# Altium PCB Carte_GR_2017.PcbDoc (part 1 of 2)
Units mil, origin at the board's own origin, x right, y up, seen from the top; angles counter-clockwise.
Board outline 6500 x 3500 mil, 2 copper layers (Top Layer, Bottom Layer); 159 components, 151 nets, 592 pads, 138 vias.
Unrouted connection lines stored in the file: 4.
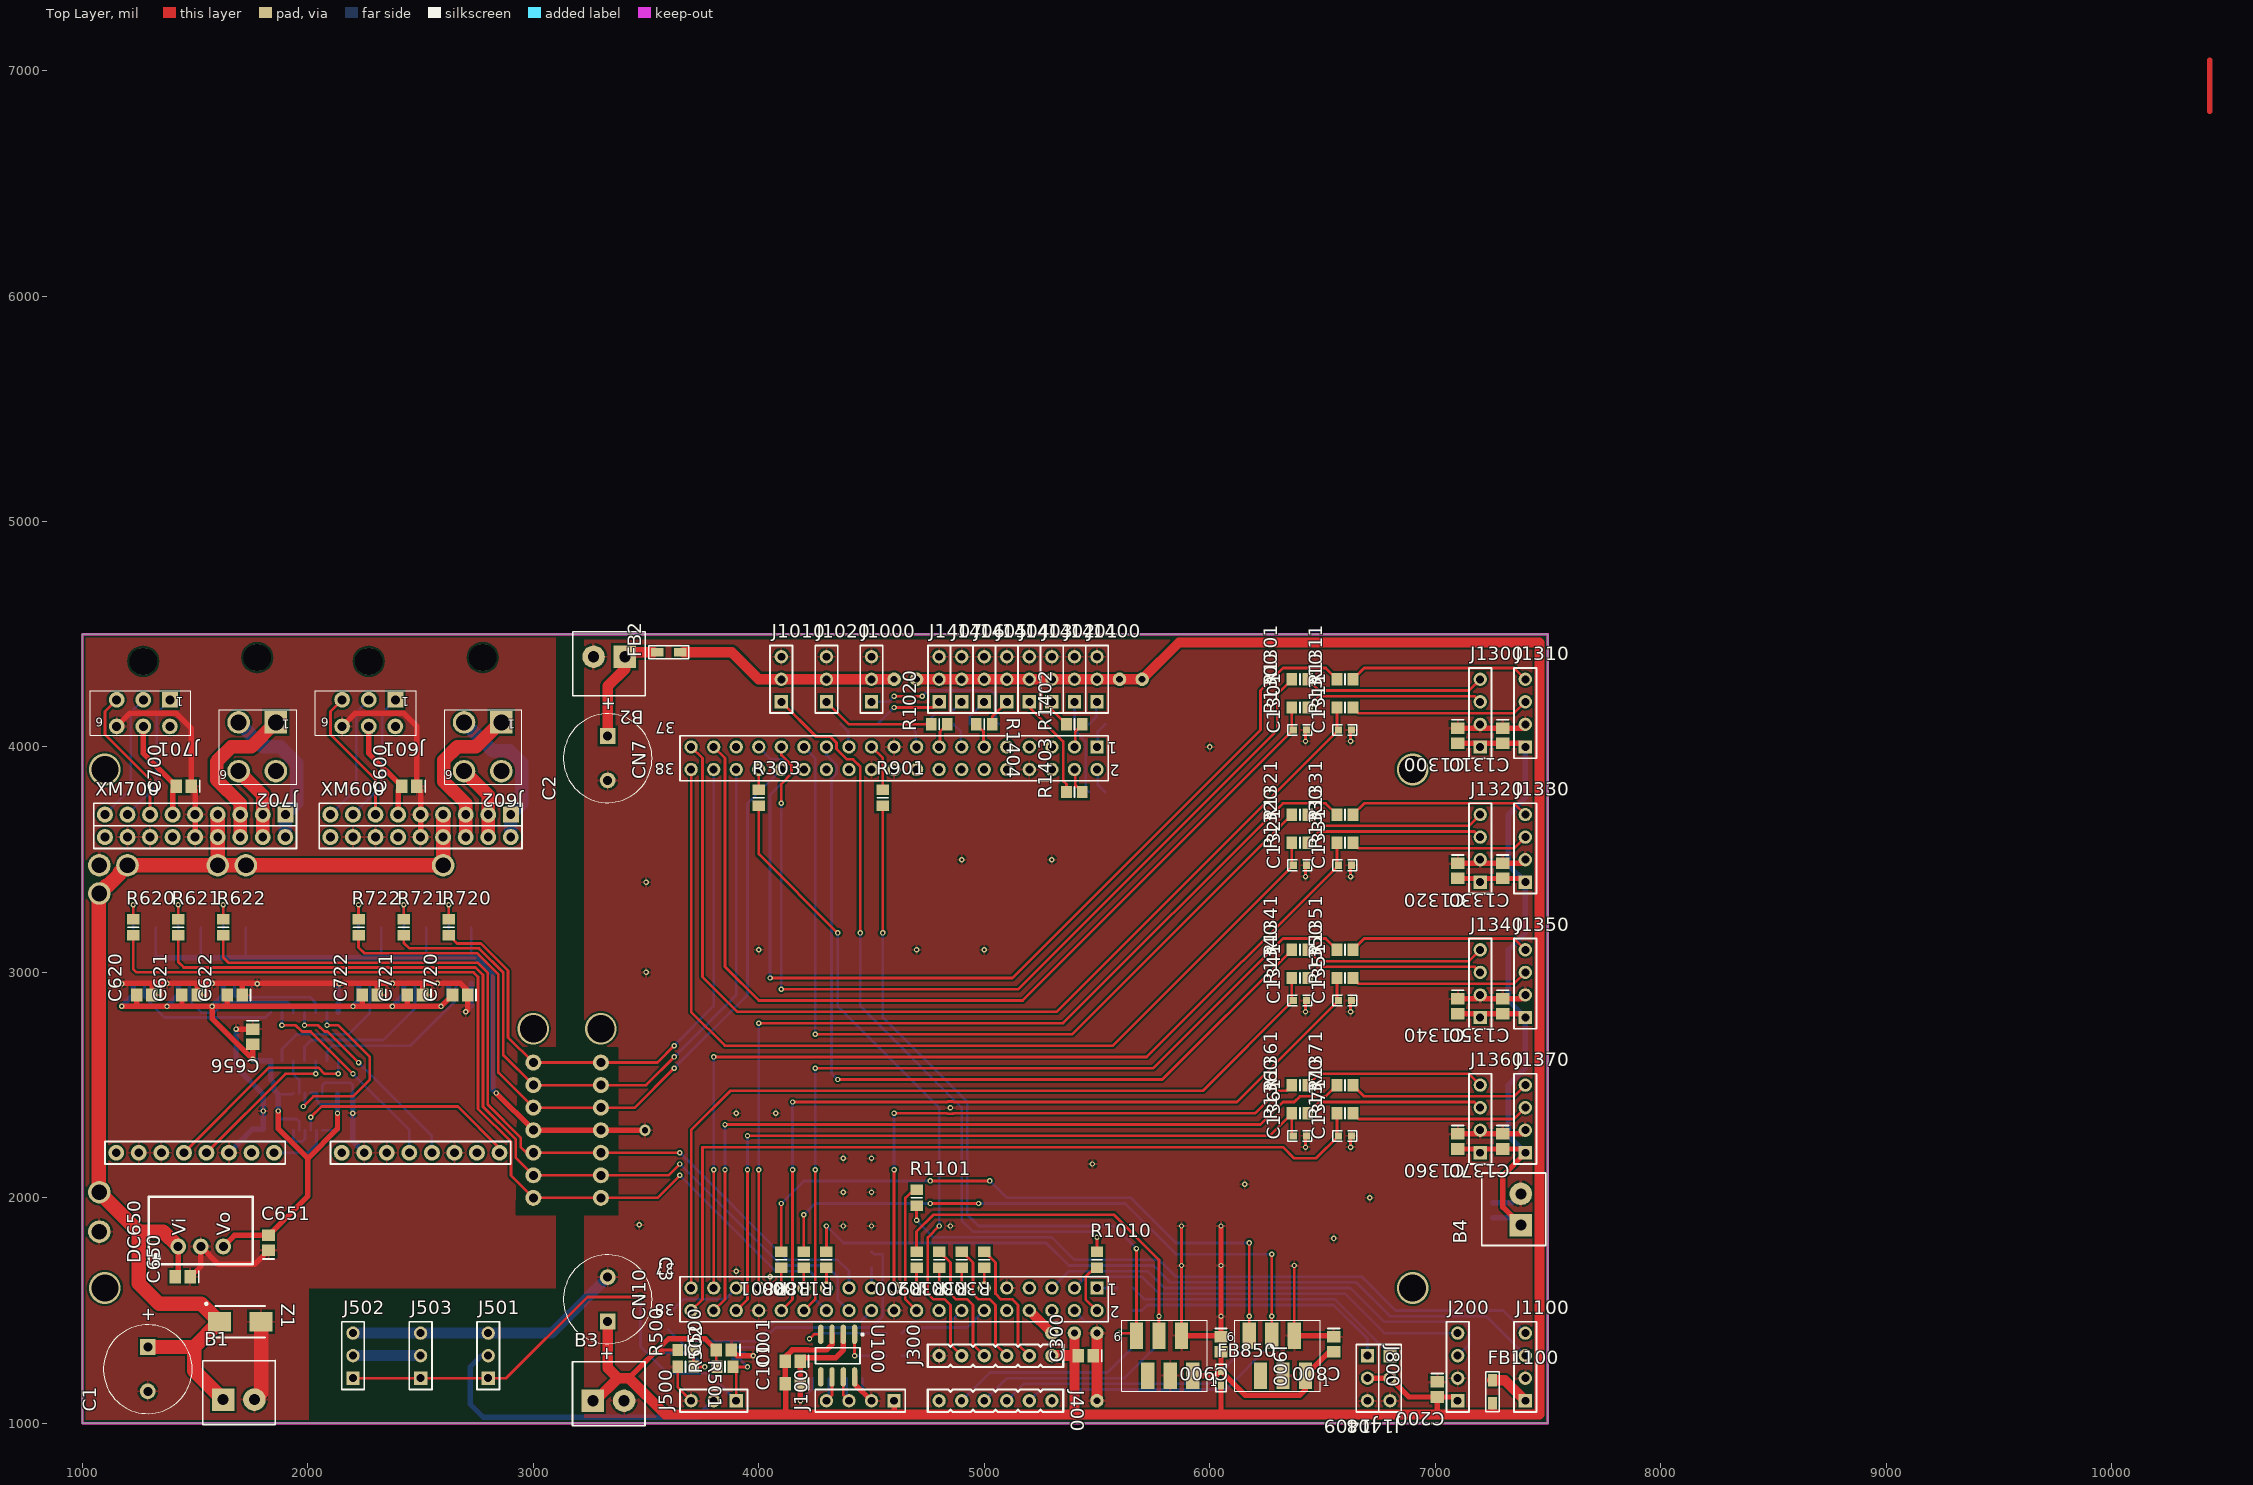
[diagram p0: Top Layer view]
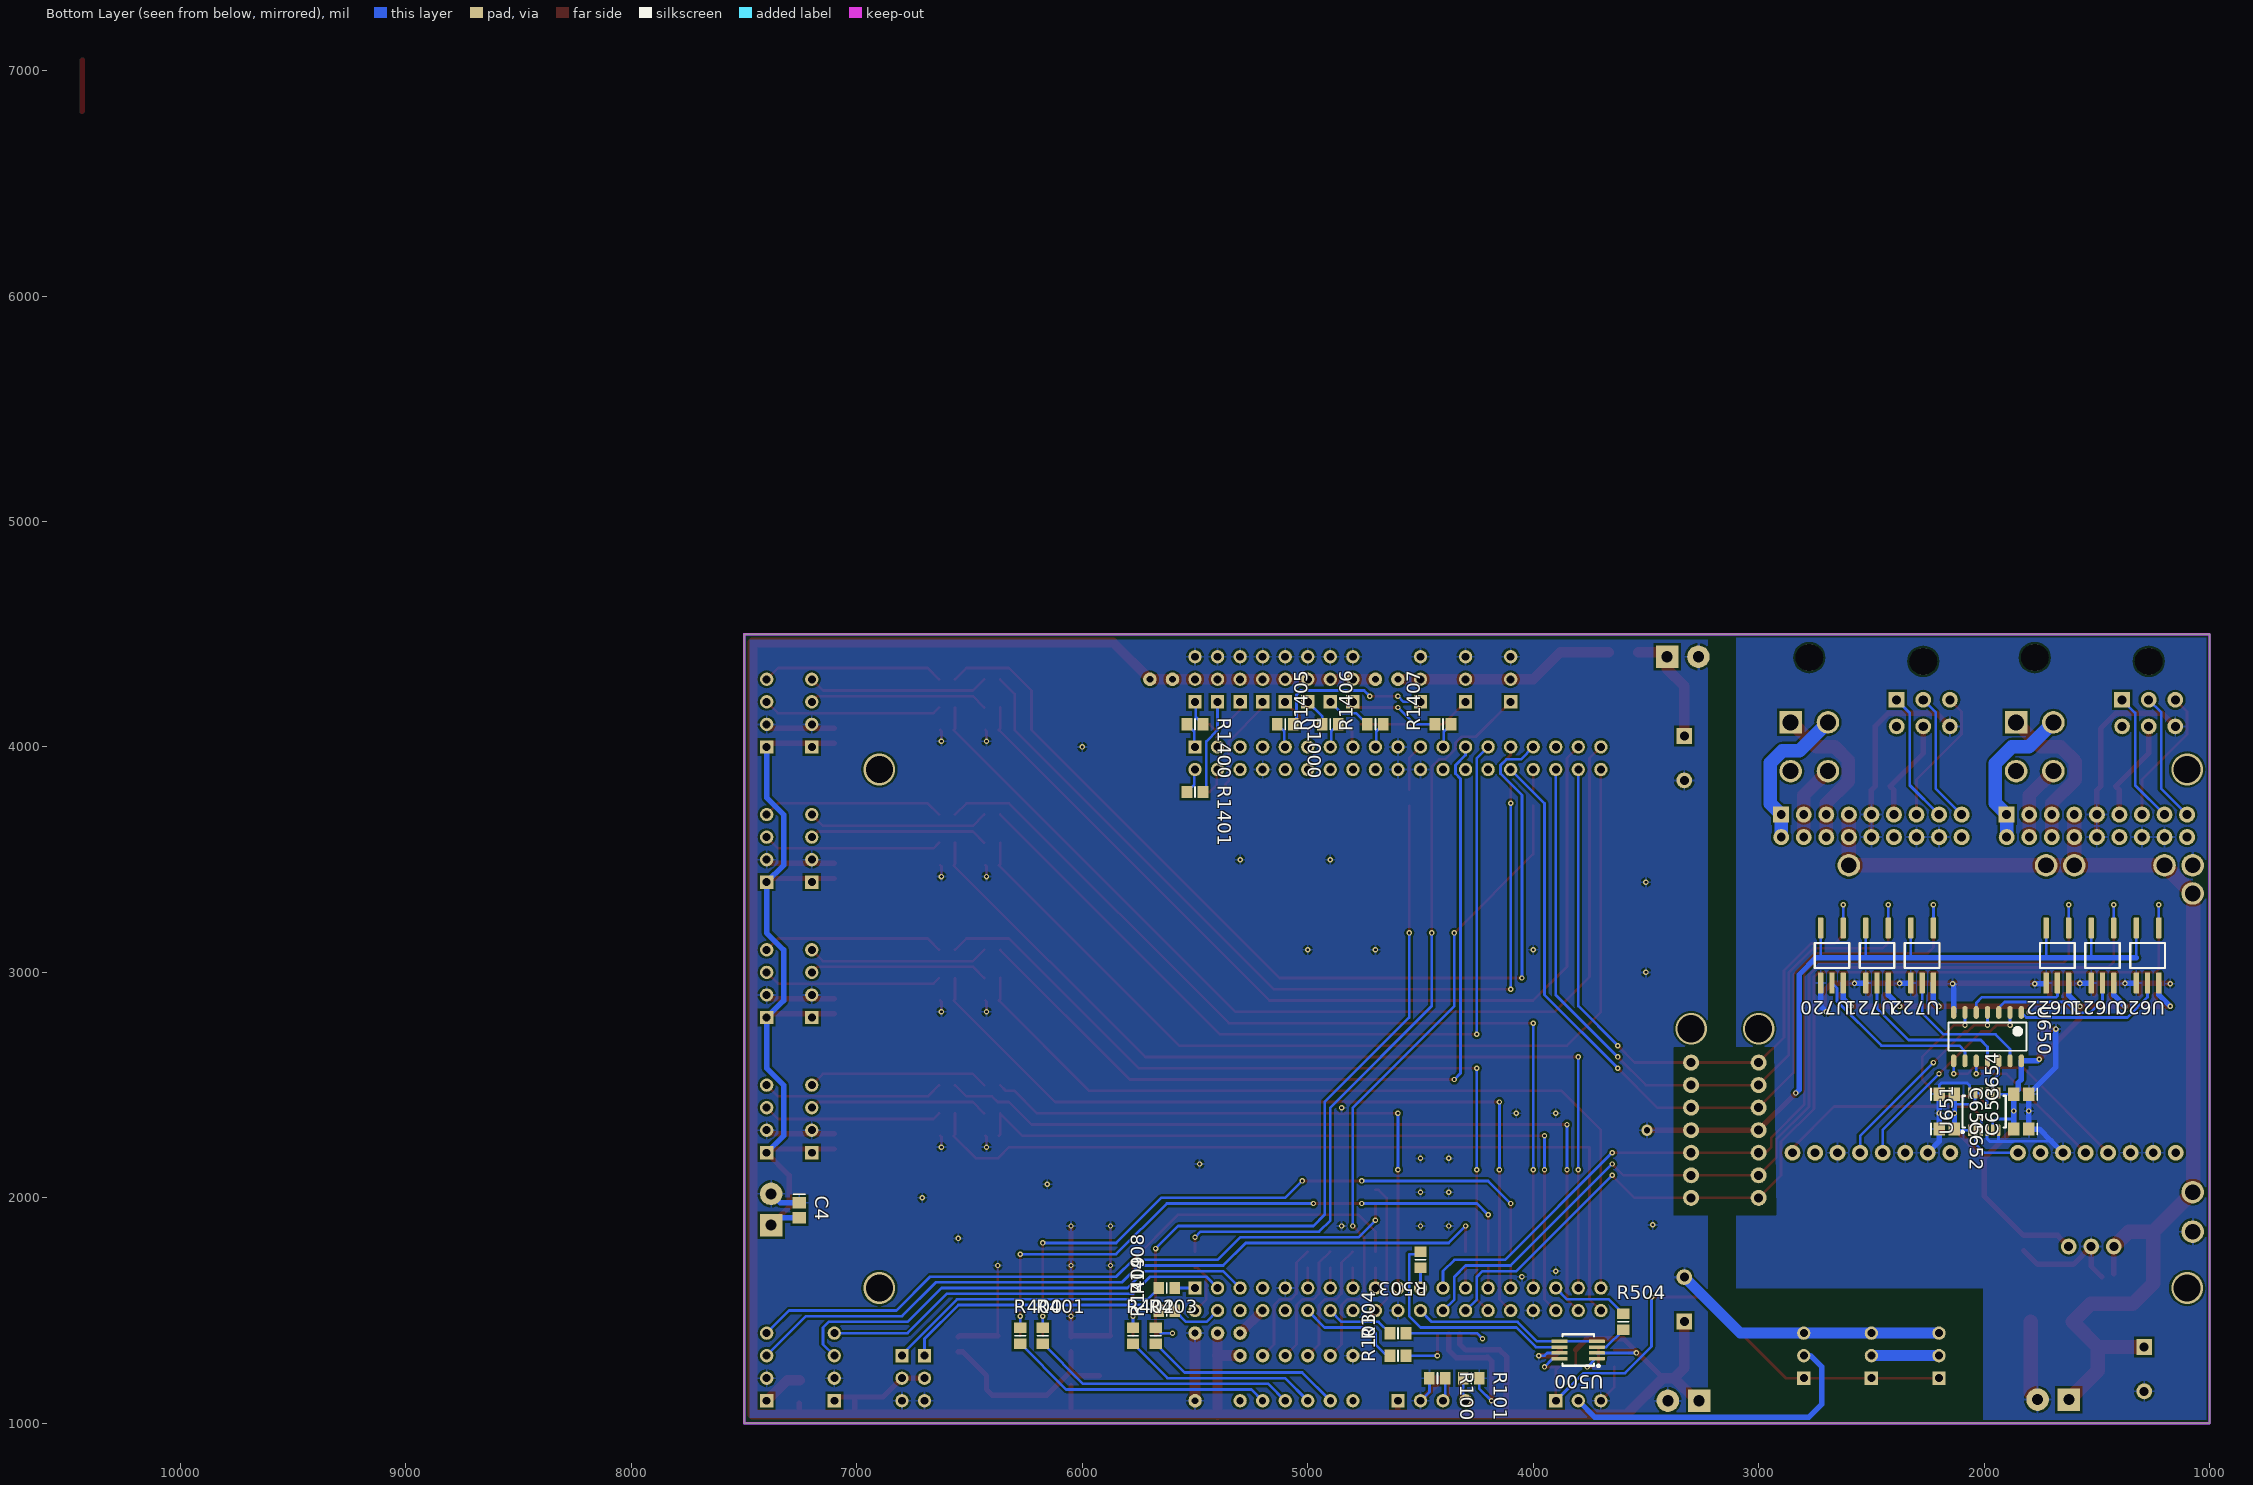
[diagram p1: Bottom Layer view, seen from below]

## Layer stack, top to bottom
Top Solder: solder mask 0.4, Solder Resist, Dk 3.5
Top Layer: signal copper 1.4
Dielectric 1: dielectric 12.6, FR-4, Dk 4.8
Bottom Layer: signal copper 1.4
Bottom Solder: solder mask 0.4, Solder Resist, Dk 3.5

## Board outline
1000,1000 7500,1000 7500,4500 1000,4500

## Design rules (kind name [scope] priority, off if disabled: settings)
Clearance [All] p1: gap=9.5
ComponentClearance [All] p1: gap=-1 collisioncheckmode=3 verticalgap=10 showdistances=FALSE
PolygonConnect [All] p1: connectstyle=Relief reliefconductorwidth=10 reliefentries=4 polygonreliefangle="90 Angle" airgapwidth=10
RoutingVias [All] p1: holewidth=28 width=50 viastyle="Through Hole" minholewidth=6 minwidth=10 maxholewidth=5000 maxwidth=5000
SolderMaskExpansion [All] p1: expansion=4
Width [All] p1: maxlimit=1000 minlimit=10 preferedwidth=20
29 further rules are at their usual default settings.

## Classes and differential pairs
component class logique: C100 C101 C200 C300 C800 C900 C1300 C1301 C1310 C1311 C1320 C1321 C1330 C1331 C1340 C1341 C1350 C1351 C1360 C1361 C1370 C1371 CN7 CN10 FB850 FB1100 J100 J200 J300 J400 J800 J900 J1100 J1300 J1310 J1320 J1330 J1340 J1350 J1360 J1370 J1400 J1401 J1402 J1403 J1404 J1405 J1406 J1407 J1408 J1409 R100 R101 R103 R104 R300 R301 R302 R303 R400 R401 R402 R403 R404 R800 R801 R900 R901 R1100 R1101 R1300 R1301 R1310 R1311 R1320 R1321 R1330 R1331 R1340 R1341 R1350 R1351 R1360 R1361 R1370 R1371 R1400 R1401 R1402 R1403 R1404 R1405 R1406 R1407 R1408 R1409 U100
component class puissance: B1 B2 B3 B4 C1 C2 C3 C4 C500 C600 C620 C621 C622 C650 C651 C652 C653 C654 C655 C656 C700 C720 C721 C722 DC650 FB2 J500 J501 J502 J503 J601 J602 J701 J702 J1000 J1010 J1020 L650 R500 R501 R502 R503 R504 R620 R621 R622 R720 R721 R722 R1000 R1010 R1020 U500 U620 U621 U622 U650 U651 U720 U721 U722 XM600 XM700 Z1

## Components (designator, comment, footprint, x,y, rotation, side; value= is the part's Value field where it differs from the comment)
B1 "1776275-2" BORNIER_2V_3.5MM 1625,1105 r0 top
B2 "1776275-2" BORNIER_2V_3.5MM 3405,4400 r180 top
B3 "1776275-2" BORNIER_2V_3.5MM 3265,1100 r0 top
B4 "1776275-2" BORNIER_2V_3.5MM 7380,1880 r90 top
C1 "330 uF" WCAP-ATG8_10x12.5x5x0.6 1290,1240 r90 top
C2 "330 uF" WCAP-ATG8_10x12.5x5x0.6 3330,3950 r90 top
C3 "330 uF" WCAP-ATG8_10x12.5x5x0.6 3330,1550 r270 top
C4 "1µF" C0805_N 7255,1945 r270 bottom
C100 "1µF" C0805_N 4150,1175 r180 top
C101 "100nF" C0805_N 4150,1275 r180 top
C200 "1µF" C0805_N 7010,1150 r270 top
C300 "1µF" C0805_N 5450,1300 r180 top
C500 "100nF" C0805_N 3845.43,1325 r180 top
C600 "1µF" C0805_N 2450,3825 r180 top
C620 "1µF" C0805_N 1275,2900 r180 top
C621 "1µF" C0805_N 1475,2900 r180 top
C622 "1µF" C0805_N 1675,2900 r180 top
C650 "1µF" C0805_N 1445,1650 r180 top
C651 "1µF" C0805_N 1825,1800 r90 top
C652 "1µF" C0805_N 2165,2305 r180 bottom
C653 "1µF" C0805_N 1835,2305 r0 bottom
C654 "1µF" C0805_N 1835,2460 r0 bottom
C655 "1µF" C0805_N 2165,2460 r180 bottom
C656 "1µF" C0805_N 1755,2715 r270 top
C700 "1µF" C0805_N 1450,3825 r180 top
C720 "1µF" C0805_N 2675,2900 r180 top
C721 "1µF" C0805_N 2475,2900 r180 top
C722 "1µF" C0805_N 2275,2900 r180 top
C800 "100nF" C0805_N 6550,1350 r270 top
C900 "100nF" C0805_N 6050,1350 r270 top
C1300 "1µF" C0805_N 7100,4050 r270 top
C1301 "47nF" "WCAP-CSGP_0603, 1.6x0.8x0.8" 6400,4075 r180 top
C1310 "1µF" C0805_N 7300,4050 r270 top
C1311 "47nF" "WCAP-CSGP_0603, 1.6x0.8x0.8" 6600,4075 r180 top
C1320 "1µF" C0805_N 7100,3450 r270 top
C1321 "47nF" "WCAP-CSGP_0603, 1.6x0.8x0.8" 6400,3475 r180 top
C1330 "1µF" C0805_N 7300,3450 r270 top
C1331 "47nF" "WCAP-CSGP_0603, 1.6x0.8x0.8" 6600,3475 r180 top
C1340 "1µF" C0805_N 7100,2850 r270 top
C1341 "47nF" "WCAP-CSGP_0603, 1.6x0.8x0.8" 6400,2875 r180 top
C1350 "1µF" C0805_N 7300,2850 r270 top
C1351 "47nF" "WCAP-CSGP_0603, 1.6x0.8x0.8" 6600,2875 r180 top
C1360 "1µF" C0805_N 7100,2250 r270 top
C1361 "47nF" "WCAP-CSGP_0603, 1.6x0.8x0.8" 6400,2275 r180 top
C1370 "1µF" C0805_N 7300,2250 r270 top
C1371 "47nF" "WCAP-CSGP_0603, 1.6x0.8x0.8" 6600,2275 r180 top
CN7 "SSW-119-01-T-D" "CONN RCPT .100\" 38POS DUAL TIN" 5500,4000 r180 top
CN10 "SSW-119-01-T-D" "CONN RCPT .100\" 38POS DUAL TIN" 5500,1600 r180 top
DC650 "Traco 5V 1A" TSR1 1525,1855 r180 top
FB2 "742792023" "WE-CBF_0805_High Current" 3600,4420 r180 top
FB850 "742792624" "WE-CBF_0603_High Current" 6050,1200 r90 top
FB1100 "742792023" "WE-CBF_0805_High Current" 7255,1140 r90 top
J100 "MC34645" HDR1X4 4600,1100 r180 top
J200 "MC34645" HDR1X4 7100,1100 r90 top
J300 "22-03-2061" 22-03-2061 5050,1300 r180 top
J400 "22-03-2061" 22-03-2061 5050,1100 r0 top
J500 "0022053031" HDR1X3 3900,1100 r180 top
J501 "0022053031" HDR1X3 2800,1200 r90 top
J502 "0022053031" HDR1X3 2200,1200 r90 top
J503 "0022053031" HDR1X3 2500,1200 r90 top
J601 "43045-0600" 43045-0600 2270,4150 r180 top
J602 "39-30-0040" 39-30-0040 2740,4050 r180 top
J701 "43045-0600" 43045-0600 1270,4150 r180 top
J702 "39-30-0040" 39-30-0040 1740,4050 r180 top
J800 "partNo" 690367280676 6300,1300 r0 top
J900 "partNo" 690367280676 5800,1300 r0 top
J1000 "0022053031" HDR1X3 4500,4200 r90 top
J1010 "0022053031" HDR1X3 4100,4200 r90 top
J1020 "0022053031" HDR1X3 4300,4200 r90 top
J1100 "MC34645" HDR1X4 7400,1100 r90 top
J1300 "MC34645" HDR1X4 7200,4000 r90 top
J1310 "MC34645" HDR1X4 7400,4000 r90 top
J1320 "MC34645" HDR1X4 7200,3400 r90 top
J1330 "MC34645" HDR1X4 7400,3400 r90 top
J1340 "MC34645" HDR1X4 7200,2800 r90 top
J1350 "MC34645" HDR1X4 7400,2800 r90 top
J1360 "MC34645" HDR1X4 7200,2200 r90 top
J1370 "MC34645" HDR1X4 7400,2200 r90 top
J1400 "0022053031" HDR1X3 5500,4200 r90 top
J1401 "0022053031" HDR1X3 5400,4200 r90 top
J1402 "0022053031" HDR1X3 5300,4200 r90 top
J1403 "0022053031" HDR1X3 5200,4200 r90 top
J1404 "0022053031" HDR1X3 5100,4200 r90 top
J1405 "0022053031" HDR1X3 5000,4200 r90 top
J1406 "0022053031" HDR1X3 4900,4200 r90 top
J1407 "0022053031" HDR1X3 4800,4200 r90 top
J1408 "0022053031" HDR1X3 6800,1300 r270 top
J1409 "0022053031" HDR1X3 6700,1300 r270 top
R100 "60" R0805_N 4425,1200 r180 bottom
R101 "60" R0805_N 4275,1200 r180 bottom
R103 "66" R0805_N 4600,1300 r0 bottom
R104 "66" R0805_N 4600,1400 r0 bottom
R300 "66" R0805_N 5000,1725 r270 top
R301 "66" R0805_N 4900,1725 r270 top
R302 "66" R0805_N 4800,1725 r270 top
R303 "66" R0805_N 4000,3775 r90 top
R400 "66" R0805_N 6275,1388.58 r90 bottom
R401 "66" R0805_N 6175,1388.58 r90 bottom
R402 "66" R0805_N 5775,1388.58 r90 bottom
R403 "66" R0805_N 5675,1388.58 r90 bottom
R500 "10k" R0805_N 3675.43,1325 r180 top
R501 "10k" R0805_N 3675.43,1250 r0 top
R502 "10k" R0805_N 3850.43,1250 r180 top
R503 "66" R0805_N 4500,1725 r270 bottom
R504 "66" R0805_N 3600,1450 r90 bottom
R620 "66" R0805_N 1225,3200 r90 top
R621 "66" R0805_N 1425,3200 r90 top
R622 "66" R0805_N 1625,3200 r90 top
R720 "66" R0805_N 2625,3200 r90 top
R721 "66" R0805_N 2425,3200 r90 top
R722 "66" R0805_N 2225,3200 r90 top
R800 "66" R0805_N 4200,1725 r270 top
R801 "66" R0805_N 4100,1725 r270 top
R900 "66" R0805_N 4700,1725 r270 top
R901 "66" R0805_N 4550,3775 r90 top
R1000 "66" R0805_N 5100,4100 r180 bottom
R1010 "66" R0805_N 5500,1725 r90 top
R1020 "66" R0805_N 4800,4100 r180 top
R1100 "66" R0805_N 4300,1725 r270 top
R1101 "66" R0805_N 4700,2000 r90 top
R1300 "66" R0805_N 6400,4175 r180 top
R1301 "66" R0805_N 6400,4300 r180 top
R1310 "66" R0805_N 6600,4175 r180 top
R1311 "66" R0805_N 6600,4300 r180 top
R1320 "66" R0805_N 6400,3575 r180 top
R1321 "66" R0805_N 6400,3700 r180 top
R1330 "66" R0805_N 6600,3575 r180 top
R1331 "66" R0805_N 6600,3700 r180 top
R1340 "66" R0805_N 6400,2975 r180 top
R1341 "66" R0805_N 6400,3100 r180 top
R1350 "66" R0805_N 6600,2975 r180 top
R1351 "66" R0805_N 6600,3100 r180 top
R1360 "66" R0805_N 6400,2375 r180 top
R1361 "66" R0805_N 6400,2500 r180 top
R1370 "66" R0805_N 6600,2375 r180 top
R1371 "66" R0805_N 6600,2500 r180 top
R1400 "66" R0805_N 5500,4100 r180 bottom
R1401 "66" R0805_N 5500,3800 r180 bottom
R1402 "66" R0805_N 5400,4100 r180 top
R1403 "66" R0805_N 5400,3800 r180 top
R1404 "66" R0805_N 5000,4100 r0 top
R1405 "66" R0805_N 4900,4100 r0 bottom
R1406 "66" R0805_N 4700,4100 r0 bottom
R1407 "66" R0805_N 4400,4100 r0 bottom
R1408 "66" R0805_N 5625,1600 r0 bottom
R1409 "66" R0805_N 5625,1500 r0 bottom
U100 "MCP2551-I/SN" SO8_N 4350,1300 r270 top
U500 "MAX485CUA+" MMAX-8 3800.43,1325 r0 bottom
U620 "ACPL-M72T" ACPL-M72T 1275,3075 r270 bottom
U621 "ACPL-M72T" ACPL-M72T 1475,3075 r270 bottom
U622 "ACPL-M72T" ACPL-M72T 1675,3075 r270 bottom
U650 "CD74HC14M" SOIC127P600X175-14N 1985,2715 r270 bottom
U651 "LTC2644" MSOP-12_LTC2644 2000,2380 r90 bottom
U720 "ACPL-M72T" ACPL-M72T 2675,3075 r270 bottom
U721 "ACPL-M72T" ACPL-M72T 2475,3075 r270 bottom
U722 "ACPL-M72T" ACPL-M72T 2275,3075 r270 bottom
XM600 "380200" 380200_goldo 2100,2200 r0 top
XM700 "380200" 380200_goldo 1100,2200 r0 top
Z1 "SMBJ54A" "SMA Diode (DO-214AA)" 1700,1450 r0 top

## Footprints (in the part's own frame and the unit in brackets; to place one, negate y for a bottom-side part, rotate by r counter-clockwise, add the part's x,y. Pads: shape width x height; smd on the part's side, far side on the other; paste and mask are expansions set on the pad)
22-03-2061 [mm]
  round 1.5 hole 0.8: 1(6.35,0) 2(3.81,0) 3(1.27,0) 4(-1.27,0) 5(-3.81,0) 6(-6.35,0)
  silkscreen extent -7.62,-1.27 7.62,1.27, body extent -7.62,-1.27 7.62,1.27, height 11.6
39-30-0040 [mm] "4 pins, straight"
  round 3 hole 3 slot 3.1 at 0 deg: 0(-0.9,-8.8)
  rect 2.54x2.54 hole 1.8: 1(-3,-1.5)
  round 2.54 hole 1.8: 2(-3,4) 3(1.2,-1.5) 4(1.2,4)
  silkscreen extent -5.33,-2.9 3.4,5.5, body extent -5.72,-15.19 4.28,4.74, height 11.4
43045-0600 [mm] "6 pins, straight"
  round 3 hole 3 slot 3.1 at 0 deg: 0(0,-5.825)
  rect 1.778x1.778 hole 1.02: 1(-3,-1.5)
  round 1.778 hole 1.02: 2(-3,1.5) 3(0,-1.5) 4(0,1.5) 5(3,-1.5) 6(3,1.5)
  silkscreen extent -5.33,-2.5 6,2.5, body extent -6.57,-10.45 6.58,1.79, height 9.83
380200_goldo [mm] "MAXON"
  rect 1.8x1.8 hole 1: 1(20.32,38.1)
  round 1.8 hole 1: 2(20.32,35.56) 3(17.78,38.1) 4(17.78,35.56) 5(15.24,38.1) 6(15.24,35.56) 7(12.7,38.1) 8(12.7,35.56) 9(10.16,38.1) 10(10.16,35.56) 11(7.62,38.1) 12(7.62,35.56) 13(5.08,38.1) 14(5.08,35.56) 15(2.54,38.1) 16(2.54,35.56) 17(0,38.1) 18(0,35.56) 19(1.27,0) 20(3.81,0) 21(6.35,0) 22(8.89,0) 23(11.43,0) 24(13.97,0) 25(16.51,0) 26(19.05,0)
  silkscreen extent -1.27,-1.27 21.59,39.37, body extent -1.27,-1.27 21.59,39.37
690367280676 [mm] "without Latch, 6 pins, SMT, straight"
  rect 1.5x3 smd: 1(3.175,-2.25) 2(1.905,2.25) 3(0.635,-2.25) 4(-0.635,2.25) 5(-1.905,-2.25) 6(-3.175,2.25)
  silkscreen extent -4.81,-4 4.81,4, body extent -4.81,-5 4.81,3.5, height 5.75
ACPL-M72T [mm]
  rrect40% 2.4x0.6 smd: 1(-3.1,1.27) 3(-3.1,-1.27) 4(3.1,-1.27) 5(3.1,0) 6(3.1,1.27)
  silkscreen extent -1.4,-1.95 1.4,1.95, body extent -2.3,-1.95 2.3,1.95, height 2.4
BORNIER_2V_3.5MM [mm]
  rect 2.54x2.54 hole 1.25: 1(-0.025,0)
  round 2.54 hole 1.25: 2(3.5,0)
  silkscreen extent -2.31,-2.82 5.84,4.39, body extent -2.27,-5.08 5.83,5.32, height 21.81
C0805_N [mm] "Chip Capacitor, Body 2.0x1.3mm, IPC Medium Density"
  rect 1.3x1.5 smd: 1(-0.85,0) 2(0.85,0)
  silkscreen extent -1.8,-0.65 -1.8,0.65, body extent -0.99,-0.63 1.01,0.63, height 0.8
"CONN RCPT .100\" 38POS DUAL TIN" [mm]
  rect 1.5x1.5 hole 0.9: 1(0,0)
  round 1.5 hole 0.9: 2(0,2.54) 3(2.54,0) 4(2.54,2.54) 5(5.08,0) 6(5.08,2.54) 7(7.62,0) 8(7.62,2.54) 9(10.16,0) 10(10.16,2.54) 11(12.7,0) 12(12.7,2.54) 13(15.24,0) 14(15.24,2.54) 15(17.78,0) 16(17.78,2.54) 17(20.32,0) 18(20.32,2.54) 19(22.86,0) 20(22.86,2.54) 21(25.4,0) 22(25.4,2.54) 23(27.94,0) 24(27.94,2.54) 25(30.48,0) 26(30.48,2.54) 27(33.02,0) 28(33.02,2.54) 29(35.56,0) 30(35.56,2.54) 31(38.1,0) 32(38.1,2.54) 33(40.64,0) 34(40.64,2.54) 35(43.18,0) 36(43.18,2.54) 37(45.72,0) 38(45.72,2.54)
  silkscreen extent -1.27,-1.27 46.99,3.81
HDR1X3 [mm]
  rect 1.5x1.5 hole 0.9: 1(0,0)
  round 1.5 hole 0.9: 2(2.54,0) 3(5.08,0)
  silkscreen extent -1.27,-1.27 6.35,1.27, body extent -1.27,-1.27 6.35,1.27, height 10.1
HDR1X4 [mm]
  rect 1.5x1.5 hole 0.9: 1(0,0)
  round 1.5 hole 0.9: 2(2.54,0) 3(5.08,0) 4(7.62,0)
  silkscreen extent -1.27,-1.27 8.89,1.27
MMAX-8 [mm]
  rrect30% 1.8x0.4 smd: 1(-2.1,0.975) 2(-2.1,0.325) 3(-2.1,-0.325) 4(-2.1,-0.975) 5(2.1,-0.975) 6(2.1,-0.325) 7(2.1,0.325)
  rrect20% 1.8x0.4 smd: 8(2.1,0.975)
  silkscreen extent -2.41,-1.78 1.78,1.9, body extent -2.46,-1.5 2.46,1.5, height 1.1
MSOP-12_LTC2644 [mm]
  rrect30% 1.27x0.4 smd: 1(-2.041,1.622) 2(-2.041,0.972) 3(-2.041,0.322) 4(-2.041,-0.328) 5(-2.041,-0.978) 6(-2.041,-1.628) 7(2.159,-1.628) 8(2.159,-0.978) 9(2.159,-0.328) 10(2.159,0.322) 11(2.159,0.972)
  rrect20% 1.27x0.4 smd: 12(2.159,1.622)
  silkscreen extent -2.35,-2.43 1.84,2.55, body extent -1.5,-2 1.5,2, height 1.1
R0805_N [mm] "Chip Resistor, Body 2.0x1.3mm, IPC Medium Density"
  rect 1.2x1.4 smd: 1(-0.9,0) 2(0.9,0)
  silkscreen extent 0,-0.6 0,0.6, body extent -1.07,-0.7 1.07,0.7, height 0.65
"SMA Diode (DO-214AA)" [mm] "Case DO-214AA"
  rect 2.6x2.2 smd: 1(2.35,0) 2(-2.35,0)
  silkscreen extent -3.93,-1.78 2.79,2.16, body extent -2.8,-1.46 2.79,1.46, height 2.41
SO8_N [mm] "8-Pin Small Outline Integrated Circuit 1.27 mm Pitch, IPC Medium Density"
  oval 2.2x0.6 smd: 1(-2.4,1.905) 2(-2.4,0.635) 3(-2.4,-0.635) 4(-2.4,-1.905) 5(2.4,-1.905) 6(2.4,-0.635) 7(2.4,0.635) 8(2.4,1.905)
  silkscreen extent -2.51,-2.5 0.9,2.92, body extent -2.89,-2.45 2.89,2.46, height 1.75
SOIC127P600X175-14N [mm] "SOIC, 14-Leads, Body 8,65x3,90mm, Pitch 1,27mm, IPC Medium Density"
  oval 1.45x0.6 smd: 1(-2.725,3.81) 2(-2.725,2.54) 3(-2.725,1.27) 4(-2.725,0) 5(-2.725,-1.27) 6(-2.725,-2.54) 7(-2.725,-3.81) 8(2.725,-3.81) 9(2.725,-2.54) 10(2.725,-1.27) 11(2.725,0) 12(2.725,1.27) 13(2.725,2.54) 14(2.725,3.81)
  silkscreen extent -2.85,-4.4 1.6,4.78, body extent -2,-4.4 2,4.4, height 1.75
TSR1 [mil]
  round 70 hole 40: 1(100,70.87) 2(0,70.87) 3(-100,70.87)
  silkscreen extent -230,-150 230,150, body extent -230,-150 230,150, height 402
WCAP-ATG8_10x12.5x5x0.6 [mil] "Polarized capacitors, Aluminum Electrolytic Capacitors, 2-Leads, Body 10x12.5x5x0.6"
  rect 70x70 hole 40: 1(98.43,0)
  round 70 hole 40: 2(-98.43,0)
  silkscreen extent -197,-197 197,197, body extent -196,-197 195,196, height 496
"WCAP-CSGP_0603, 1.6x0.8x0.8" [mm] "WCAP-CSGP Ceramic Capacitors, size 0603, body 1.6x0.8x0.8"
  rect 0.8x0.8 smd: 1(-0.75,0) 2(0.75,0)
  silkscreen extent -1.35,-0.6 1.35,0.6, body extent -0.8,-0.4 0.8,0.4, height 0.8
"WE-CBF_0603_High Current" [mm] "SMD EMI Suppression Ferrite  Bead, body 1.6mmx0.8mm"
  rect 0.95x0.7 smd: 1(-0.825,0) 2(0.825,0)
  silkscreen extent -1.55,-0.6 1.55,0.6, body extent -0.8,-0.4 0.8,0.4, height 0.8
"WE-CBF_0805_High Current" [mm] "SMD EMI Suppression Ferrite  Bead, body 2.0mmx1.2mm"
  rect 1.4x1 smd: 1(-1.3,0) 2(1.3,0)
  silkscreen extent -2.25,-0.75 2.25,0.75, body extent -1,-0.6 1,0.6, height 0.93

## Part data
B1 B2 B3 B4: "TERM BLOCK 2POS SIDE ENT 3.5MM"
C1 C2 C3: library part "WCAP-ATG8, 860010575012", "CAP Alu 330 UF 20% 35 V"
C4 C100 C101 C200 C300 C500 C600 C620 C621 C622 C650 C651 C652 C653 C654 C655 C656 C700 C720 C721 C722 C800 C900 C1300 C1310 C1320 C1330 C1340 C1350 C1360 C1370: library part Condensateur, "Capacitor"
C1301 C1311 C1321 C1331 C1341 C1351 C1361 C1371: library part "WCAP-CSGP, 885012206093", "CAP CER 47nF 50V X7R 0603"
CN7 CN10: "CONN RCPT .100\" 38POS DUAL TIN"
DC650: library part TSR1-24120, "Traco 12.0V 12W 1A"
FB2 FB1100: library part "WE-CBF, 742792023", "Ferrite Bead 120ohm 0805 max3.0A"
FB850: library part "WE-CBF, 742792624", "Ferrite Bead 180ohm 0603 max1.5A"
J100 J200 J1100 J1300 J1310 J1320 J1330 J1340 J1350 J1360 J1370: "MULTICOMP - MC34645 - EMB. MALE COUDEE  CON. MALE 2.54MM 4VOIE"
J500 J501 J502 J503 J1000 J1010 J1020 J1400 J1401 J1402 J1403 J1404 J1405 J1406 J1407 J1408 J1409: "CONN HEADER 3POS .100 R/A TIN"
J601 J701: "CONN HEADER 6POS 3MM RT ANG TIN"
J602 J702: "MOLEX  39-30-0040 4.2 mm, 4 Contact(s)"
J800 J900: library part 690367280676, "WR-MM Female SMT Connector with Polarization"
R100 R101 R103 R104 R300 R301 R302 R303 R400 R401 R402 R403 R500 R501 R502 R503 R504 R620 R621 R622 R720 R721 R722 R800 R801 R900 R901 R1000 R1010 R1020 R1100 R1101 R1300 R1301 R1310 R1311 R1320 R1321 R1330 R1331 R1340 R1341 R1350 R1351 R1360 R1361 R1370 R1371 R1400 R1401 R1402 R1403 R1404 R1405 R1406 R1407 R1408 R1409: library part Resistor, "Resistor"
U100: "IC TRANSCEIVER CAN HI-SPD 8-SOIC"
U500: "IC TXRX RS485/RS422 8-UMAX"
U620 U621 U622 U720 U721 U722: "Optocoupleur"
U650: "IC HEX INV SCHMITT TRIG 14-SOIC"
XM600 XM700: "DEC Module 50/5, amplificateur EC 1 Q 50 V / 5 A, régulation de vitesse, module OEM"
Z1: "DIODE TVS (Transil unidirectionelle)"

## Free pads (board coordinates)
  round 60 hole 30: 2(5400,1400) 2(5500,1100) 2(5500,1400) 3(5300,1400) 4(4600,4300) 5(4700,4300) 5(5600,4300) 5(5700,4300)
  round 100 hole 70: 6(1075,2025) 7(1075,3350) 8(1200,3475) 9(1600,3475) 10(1725,3475) 11(2600,3475) 12(1075,1850) 13(1075,3475)
  round 71 hole 40 paste+0: 14(3000,2000) 14(3000,2100) 14(3000,2200) 14(3000,2300) 14(3000,2400) 14(3000,2500) 14(3000,2600) 14(3300,2000) 14(3300,2100) 14(3300,2200) 14(3300,2300) 14(3300,2400) 14(3300,2500) 14(3300,2600)

## Via types
v1: diameter 24, hole 12, Top Layer to Bottom Layer, 131 vias
v2: diameter 140, hole 120, Top Layer to Bottom Layer, 6 vias
v3: diameter 50, hole 28, Top Layer to Bottom Layer, 1 vias

## Nets (pads, with @x,y where several pads share a name; then routed paths per layer and width w, separated by ;. In a path a pad name is that pad's centre, name@x,y a point inside that pad or via, vN(x,y) a via of type N, cw(c..) or ccw(c..) an arc to the next point about the centre after c; other vN are vias at no path point)
3.3V: B4.1 C4.2 C1300.2 C1310.2 C1320.2 C1330.2 C1340.2 C1350.2 C1360.2 C1370.2 J1300.1 J1310.1 J1320.1 J1330.1 J1340.1 J1350.1 J1360.1 J1370.1 | length 3788.9
  Top Layer w24: C1360.2@7100,2216.54 7183.46,2216.54 J1360.1@7200,2200 7216.54,2216.54 C1370.2@7300,2216.54 7383.46,2216.54 J1370.1@7400,2200 7300,2100 7300,1959 B4.1@7380,1879 ; C1340.2@7100,2816.54 7183.46,2816.54 J1340.1@7200,2800 7216.54,2816.54 C1350.2@7300,2816.54 7383.46,2816.54 J1350.1@7400,2800 ; C1320.2@7100,3416.54 7183.46,3416.54 J1320.1@7200,3400 7216.54,3416.54 C1330.2@7300,3416.54 7383.46,3416.54 J1330.1@7400,3400 ; C1300.2@7100,4016.54 C1310.2@7300,4016.54 7383.46,4016.54 J1310.1@7400,4000
  Bottom Layer w24: C4.2@7255,1911.54 7347.46,1911.54 B4.1@7380,1879 ; J1370.1@7400,2200 7325,2275 7325,2500 7400,2575 J1350.1@7400,2800 7325,2875 7325,3100 7400,3175 J1330.1@7400,3400 7325,3475 7325,3700 7400,3775 J1310.1@7400,4000
5V: B3.1 C3.1 C100.2 C101.2 C200.2 C300.2 C500.2 CN7.5 CN10.8 FB850.1 FB1100.1 J100.1 J200.1 J300.6 J1400.2 J1401.2 J1402.2 J1403.2 J1404.2 J1405.2 J1406.2 J1407.2 J1408.2 J1409.2 pad.2@5400,1400 pad.3 pad.5 R500.2 R502.2 U100.3 U500.2 | length 13586.1
  Top Layer w12: v1(3542.2,1312.2) 3577.2,1312.2 ; 3550,1325 R500.2@3640,1325 ; R502.2@3811.97,1253.03 C500.2@3811.97,1325
  Top Layer w24: 3425,1200 3600,1375 3761.97,1375 C500.2@3811.97,1325 ; 4120,1038.97 4120,1171.54 C100.2@4116.54,1175 C101.2@4116.54,1275 4116.54,1293.59 4148.97,1326.03 4217.96,1326.03 4218.99,1325 4300,1325 4325,1350 U100.3@4325,1394.49 ; 4600,1038.97 J100.1@4600,1100 ; 6050,1038.5 FB850.1@6050,1167.52 ; J1409.2@6700,1200 J1408.2@6800,1200 6883.46,1116.54 C200.2@7010,1116.54 ; 7010,1038.5 C200.2@7010,1116.54 ; J200.1@7100,1100 7083.46,1116.54 C200.2@7010,1116.54 ; FB1100.1@7255,1088.82 7255,1043.5 7260,1038.5
  Top Layer w44: 3585,1040 3586.03,1038.97 4120,1038.97 4600,1038.97 5400,1038.97 ; CN10.8@5200,1500 pad.3@5300,1400 ; 5400,1036.5 5400,1038.97 ; pad.2@5400,1400 5400,1300 5400,1038.97 ; pad.5@5700,4300 5863.5,4463.5 7463.5,4463.5 7463.5,1040 7462,1038.5 7260,1038.5 7010,1038.5 6050,1038.5 5474.53,1038.5 5474.05,1038.97 5400,1038.97
  Top Layer w48: B3.1@3264,1100 3275,1100 3375,1200 ; C3.1@3330,1451.57 3330,1245 3375,1200 ; 3585,1040 3425,1200 3375,1200 ; pad.5@4700,4300 J1407.2@4800,4300 J1406.2@4900,4300 J1405.2@5000,4300 J1404.2@5100,4300 J1403.2@5200,4300 J1402.2@5300,4300 J1401.2@5400,4300 J1400.2@5500,4300 pad.5@5600,4300 pad.5@5700,4300 ; J300.6@5300,1300 C300.2@5400,1300
  Bottom Layer w12: v1(3542.2,1312.2) U500.2@3717.76,1312.2
5V_ENC: C800.2 C900.2 FB850.2 J800.1 J900.1 | length 877.6
  Top Layer w24: J900.1@5925,1211.42 6028.94,1211.42 FB850.2@6050,1232.48 ; C900.2@6050,1316.54 FB850.2@6050,1232.48 ; C800.2@6550,1316.54 6530.12,1316.54 J800.1@6425,1211.42 6425,1150 6400,1125 6157.48,1125 FB850.2@6050,1232.48
5V_OPTO: C620.2 C621.2 C622.2 C651.2 C652.2 C653.2 C654.2 C655.2 C656.2 C720.2 C721.2 C722.2 DC650.3 U620.6 U621.6 U622.6 U650.14 U651.1 U651.5 U651.7 U651.10 U651.11 U720.6 U721.6 U722.6 | length 4977
  Top Layer w24: v1(1175,2850) 1176.03,2848.97 v1(1375,2848.97) v1(1575,2848.97) ; 1241.54,2850.51 C620.2@1241.54,2900 ; 1441.54,2850.51 C621.2@1441.54,2900 ; DC650.3@1625,1784.13 1674.33,1833.46 C651.2@1825,1833.46 2000,2008.46 2000,2175 ; 1641.54,2850.51 C622.2@1641.54,2900 ; C656.2@1755,2681.54 v1(1755,2615) 1575,2795 v1(1575,2848.97) ; v1(1868.46,2385) 1868.46,2306.54 2000,2175 ; v1(2131.54,2375) 2131.54,2306.54 2000,2175 ; 2241.54,2852.44 C722.2@2241.54,2900 ; 2441.54,2852.44 C721.2@2441.54,2900 ; C720.2@2641.54,2900 v1(2590.51,2848.97) v1(2375,2848.97) v1(2200,2848.97) v1(1575,2848.97)
  Bottom Layer w0: 1927.12,2460 U651.7@1932.12,2465
  Bottom Layer w12: 1868.46,2350 1950,2350 1961.5,2338.5 U651.5@1961.5,2299.65 ; C654.2@1868.46,2460 1927.12,2460 1930.91,2460 U651.7@1935.91,2465 ; U651.10@2012.68,2465 U651.11@2038.27,2465 2040.48,2462.78 2040.48,2429.52 2055,2415 2131.54,2415 ; U651.1@2063.86,2299.65 2126.18,2299.65 C652.2@2131.54,2305
  Bottom Layer w24: v1(1175,2850) 1225,2900 U620.6@1225,2952.95 ; v1(1375,2848.97) 1425,2898.97 U621.6@1425,2952.95 ; v1(1575,2848.97) 1625,2898.97 U622.6@1625,2952.95 ; v1@1762.28,2607.72 U650.14@1835,2607.72 1835,2524.65 1848.63,2511.03 1848.63,2479.84 C654.2@1868.46,2460 v1(1868.46,2385) 1868.46,2350 C653.2@1868.46,2305 ; C652.2@2131.54,2305 v1(2131.54,2375) 2131.54,2415 C655.2@2131.54,2460 ; v1(2200,2848.97) 2225,2873.97 U722.6@2225,2952.95 ; v1(2375,2848.97) 2425,2898.97 U721.6@2425,2952.95 ; v1(2590.51,2848.97) 2625,2883.46 U720.6@2625,2952.95
5V_SERVO: FB2.1 J1000.2 J1010.2 J1020.2 pad.4 | length 983.5
  Top Layer w48: FB2.1@3666.18,4420 3880,4420 4000,4300 J1010.2@4100,4300 J1020.2@4300,4300 J1000.2@4500,4300 pad.4@4600,4300
24V: B1.1 C1.1 C650.2 DC650.1 pad.6 pad.7 pad.8 pad.9 pad.10 pad.11 XM600.7 XM600.8 XM700.7 XM700.8 Z1.2 | length 5236.7
  Top Layer w24: C650.2@1425,1663.46 DC650.1@1425,1784.13
  Top Layer w64: C1.1@1290,1338.43 1495.91,1338.43 ; DC650.1@1425,1784.13 1359.13,1850 1250,1850 ; XM700.7@1600,3700 XM700.8@1600,3600 pad.9@1600,3475 ; B1.1@1624,1105 1495.91,1233.09 1495.91,1338.43 ; XM600.7@2600,3700 XM600.8@2600,3600 pad.11@2600,3475 pad.10@1725,3475 pad.9@1600,3475 ; 1250,1850 pad.6@1075,2025 1073.07,2026.93 1073.07,3350 1106.57,3383.5 1112.9,3383.5 1166.5,3437.1 1166.5,3443.43 1198.07,3475 pad.8@1200,3475 pad.9@1600,3475 ; 1250,1850 1250,1620 1340,1530 1527.48,1530 Z1.2@1607.48,1450 1495.91,1338.43
ADC_RES1: CN10.10
ADC_RES2: CN10.6
CANH: J100.3 R100.2 U100.7 | length 220.2
  Top Layer w12: U100.7@4375,1205.51 4375,1125 J100.3@4400,1100
  Bottom Layer w12: R100.2@4389.57,1200 4389.57,1110.43 J100.3@4400,1100
CANL: J100.4 R101.1 U100.6 | length 220.2
  Top Layer w12: J100.4@4300,1100 4325,1125 U100.6@4325,1205.51
  Bottom Layer w12: J100.4@4300,1100 4310.43,1110.43 R101.1@4310.43,1200
DYNAMIXEL_D0: J500.1 J501.1 J502.1 J503.1 R502.1 U500.8 | length 2470.3
  Top Layer w12: J502.1@2200,1200 J503.1@2500,1200 J501.1@2800,1200 2880,1200 3240,1560 v1(3475,1560) ; J500.1@3900,1100 3900,1235.87 R502.1@3885.87,1250 v1(3950,1250)
  Bottom Layer w12: v1(3475,1560) 3475,1340.52 3593.02,1222.5 3777.5,1222.5 J500.1@3900,1100 ; U500.8@3883.11,1286.61 3913.39,1286.61 v1(3950,1250)
GND: B2.2 B3.2 B4.2 C2.2 C3.2 C4.1 C100.1 C101.1 C200.1 C300.1 C500.1 C800.1 C900.1 C1300.1 C1301.1 C1310.1 C1311.1 C1320.1 C1321.1 C1330.1 C1331.1 C1340.1 C1341.1 C1350.1 C1351.1 C1360.1 C1361.1 C1370.1 C1371.1 CN7.8 CN7.19 CN7.20 CN7.22 CN10.9 CN10.20 CN10.32 J100.2 J200.2 J300.1 J500.3 J501.3 J502.3 J503.3 J800.2 J800.3 J900.2 J900.3 J1000.3 J1010.3 J1020.3 J1100.2 J1300.2 J1310.2 J1320.2 J1330.2 J1340.2 J1350.2 J1360.2 J1370.2 J1400.3 J1401.3 J1402.3 J1403.3 J1404.3 J1405.3 J1406.3 J1407.3 J1408.3 J1409.3 pad.2@5500,1100 pad.2@5500,1400 pad.14@3000,2300 pad.14@3300,2300 R100.1 R101.2 R501.1 U100.2 U100.8 U500.7 U620.3 U621.3 U622.3 U720.3 U721.3 U722.3 | length 49774.6
  Top Layer w10: 1000,1000 1000,4500 7500,4500 7500,1000 2000,1000 1000,1000
  Top Layer w12: R501.1@3640,1250 3640,1160 J500.3@3700,1100 ; J900.2@5875,1388.58 v1(5875,1700) v1(5875,1875) ; J800.2@6375,1388.58 v1(6375,1700) ; v1(6425,2225) 6425,2270.47 C1361.1@6429.53,2275 ; v1(6425,2825) 6425,2870.47 C1341.1@6429.53,2875 ; v1(6425,3425) 6425,3470.47 C1321.1@6429.53,3475 ; v1(6425,4025) 6425,4070.47 C1301.1@6429.53,4075 ; v1(6625,2225) 6625,2270.47 C1371.1@6629.53,2275 ; v1(6625,2825) 6625,2870.47 C1351.1@6629.53,2875 ; v1(6625,3425) 6625,3470.47 C1331.1@6629.53,3475 ; v1(6625,4025) 6625,4070.47 C1311.1@6629.53,4075
  Top Layer w24: v1(2835,2465) pad.14@3000,2300 pad.14@3300,2300 v3(3495,2300) v3@3500,2295 ; C500.1@3878.9,1325 3903.9,1300 v1(3975,1300) ; v1(4185,1100) 4183.46,1101.54 C100.1@4183.46,1175 C101.1@4183.46,1275 4200.99,1292.53 4204.08,1292.53 4205.11,1291.5 4341.5,1291.5 4375,1325 U100.2@4375,1394.49 ; U100.8@4425,1205.51 4425,1175 J100.2@4500,1100 ; J900.2@5875,1388.58 6044.88,1388.58 C900.1@6050,1383.46 v1(6050,1475) v1(6050,1700) v1(6050,1875) ; J800.2@6375,1388.58 6544.88,1388.58 C800.1@6550,1383.46 ; C1360.1@7100,2283.46 7183.46,2283.46 J1360.2@7200,2300 7216.54,2283.46 C1370.1@7300,2283.46 7383.46,2283.46 J1370.2@7400,2300 ; C1340.1@7100,2883.46 7183.46,2883.46 J1340.2@7200,2900 7216.54,2883.46 C1350.1@7300,2883.46 7383.46,2883.46 J1350.2@7400,2900 ; C1320.1@7100,3483.46 C1330.1@7300,3483.46 7383.46,3483.46 J1330.2@7400,3500 ; C1300.1@7100,4083.46 C1310.1@7300,4083.46 7383.46,4083.46 J1310.2@7400,4100
  Top Layer w48: pad.2@5500,1100 pad.2@5500,1400
  Bottom Layer w10: 1000,1000 1000,4500 7500,4500 7500,1000 2000,1000 1000,1000
  Bottom Layer w12: 1325,3065 U620.3@1325,3197.05 ; 1525,3065 U621.3@1525,3197.05 ; 1725,3065 U622.3@1725,3197.05 ; 2325,3070 U722.3@2325,3197.05 ; 2525,3065 U721.3@2525,3197.05 ; 2725,3070 U720.3@2725,3197.05 ; U500.7@3883.11,1312.2 3937.8,1312.2 3950,1300 v1(3975,1300) ; v1(4185,1100) 4239.57,1154.57 R101.2@4239.57,1200 ; R100.1@4460.43,1200 4460.43,1139.57 J100.2@4500,1100
  Bottom Layer w24: 1325,3065 1525,3065 1725,3065 2525,3065 2745,3065 2820,2990 2820,2480 v1(2835,2465) ; C4.1@7255,1978.46 7340.67,1978.46 B4.2@7380,2017.8
  Bottom Layer w48: J502.3@2200,1400 J503.3@2500,1400 J501.3@2800,1400 3081.57,1400 C3.2@3330,1648.43
  other v1: 4050,1650 3900,1675 6550,1820 4375,1875 4500,1875 4850,1875 3470,1880 6710,2000 4375,2025 4500,2025 6155,2060 5480,2150 4375,2175 4500,2175 3900,2375 4075,2375 4850,2400 3500,3000 4000,3100 4700,3100 5000,3100 3500,3400 4900,3500 5300,3500 6000,4000